# Altium PCB 4.2寸墨水屏-兼容甘草酸不酸_2024-11-22.pcbdoc
Units mil, origin at the board's own origin, x right, y up, seen from the top; angles counter-clockwise.
Board outline 5779.52 x 5098.42 mil, 2 copper layers (Top Layer, Bottom Layer); 86 components, 68 nets, 320 pads, 212 vias.
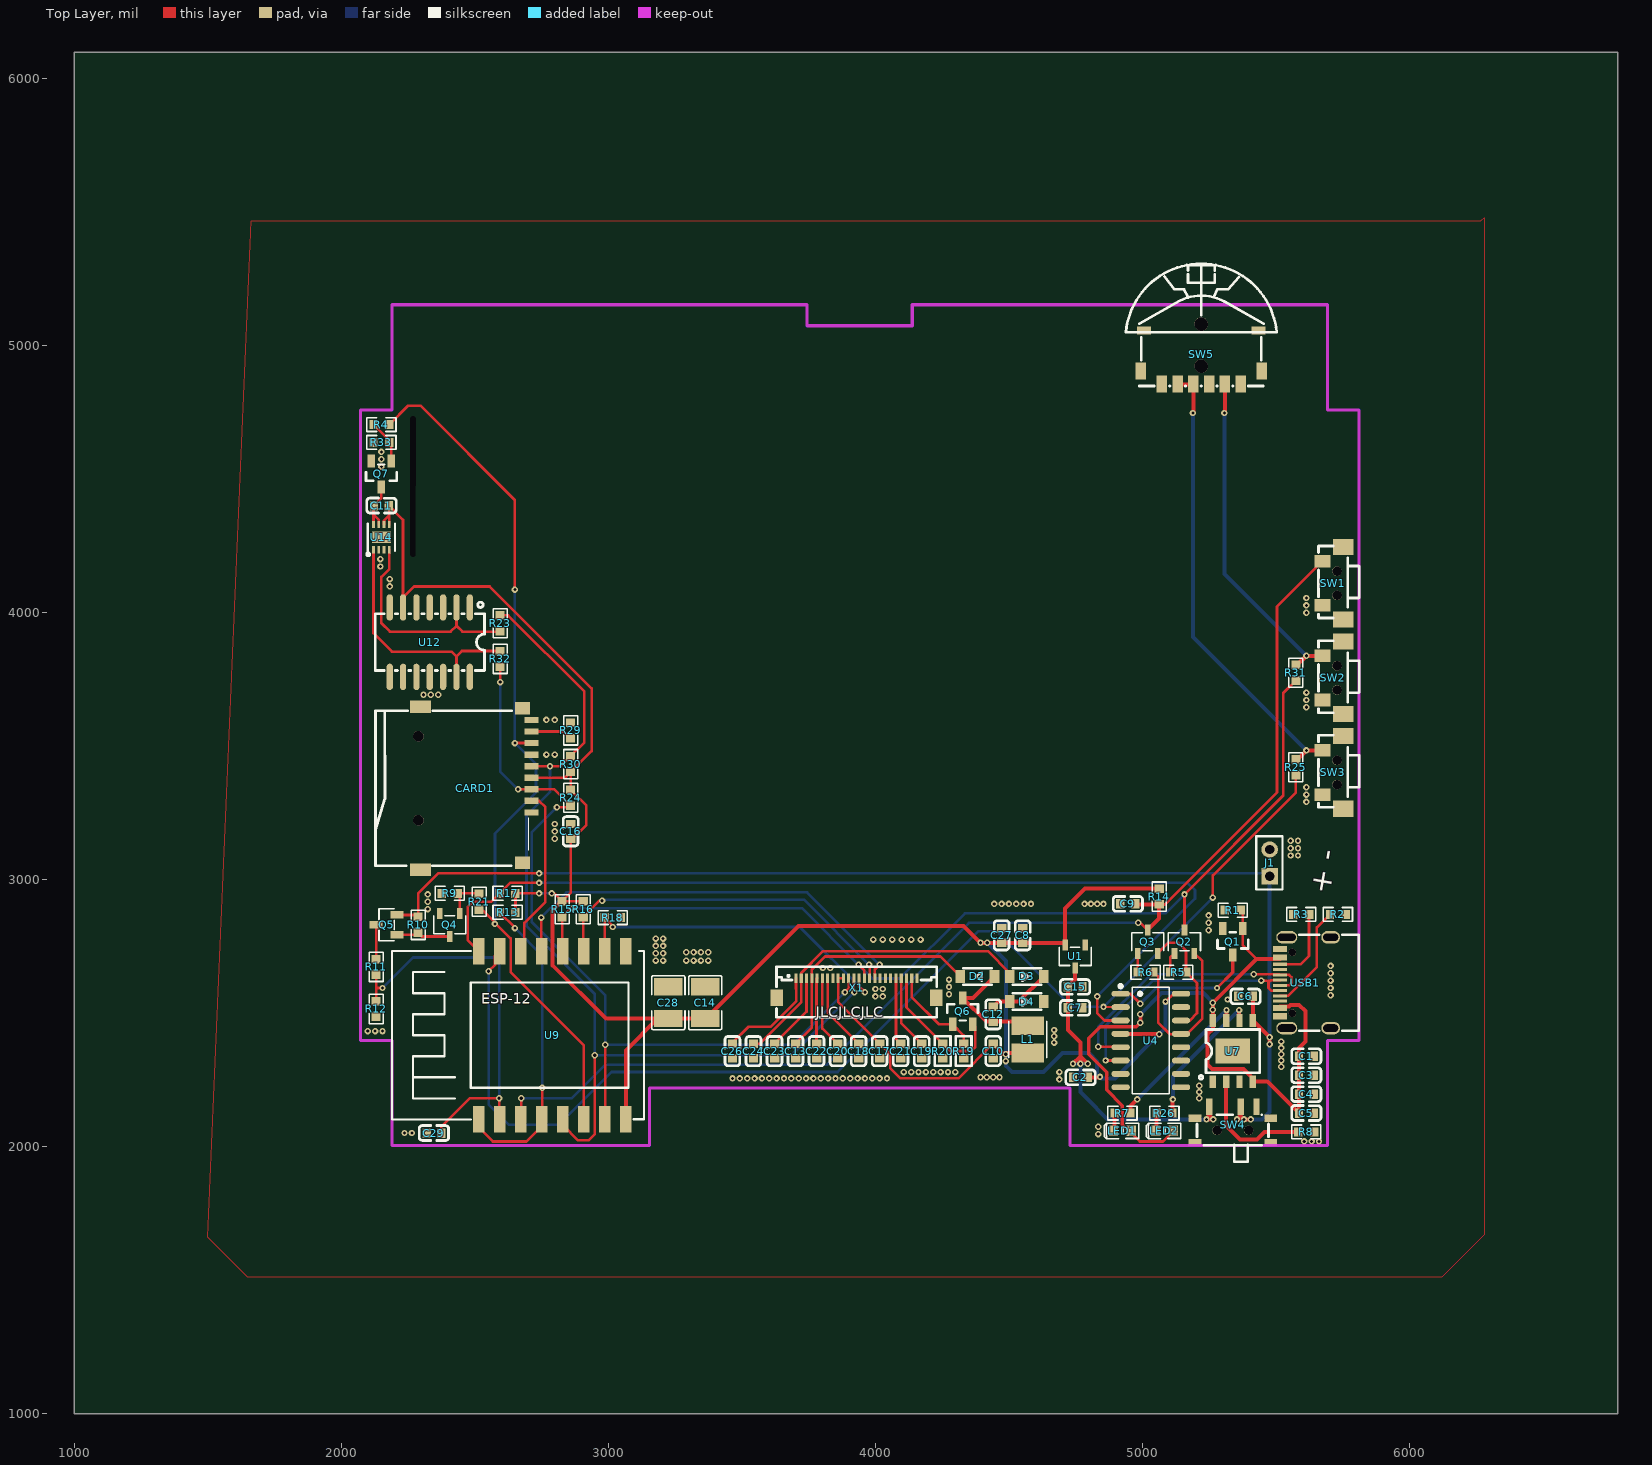
[diagram p0: Top Layer view]
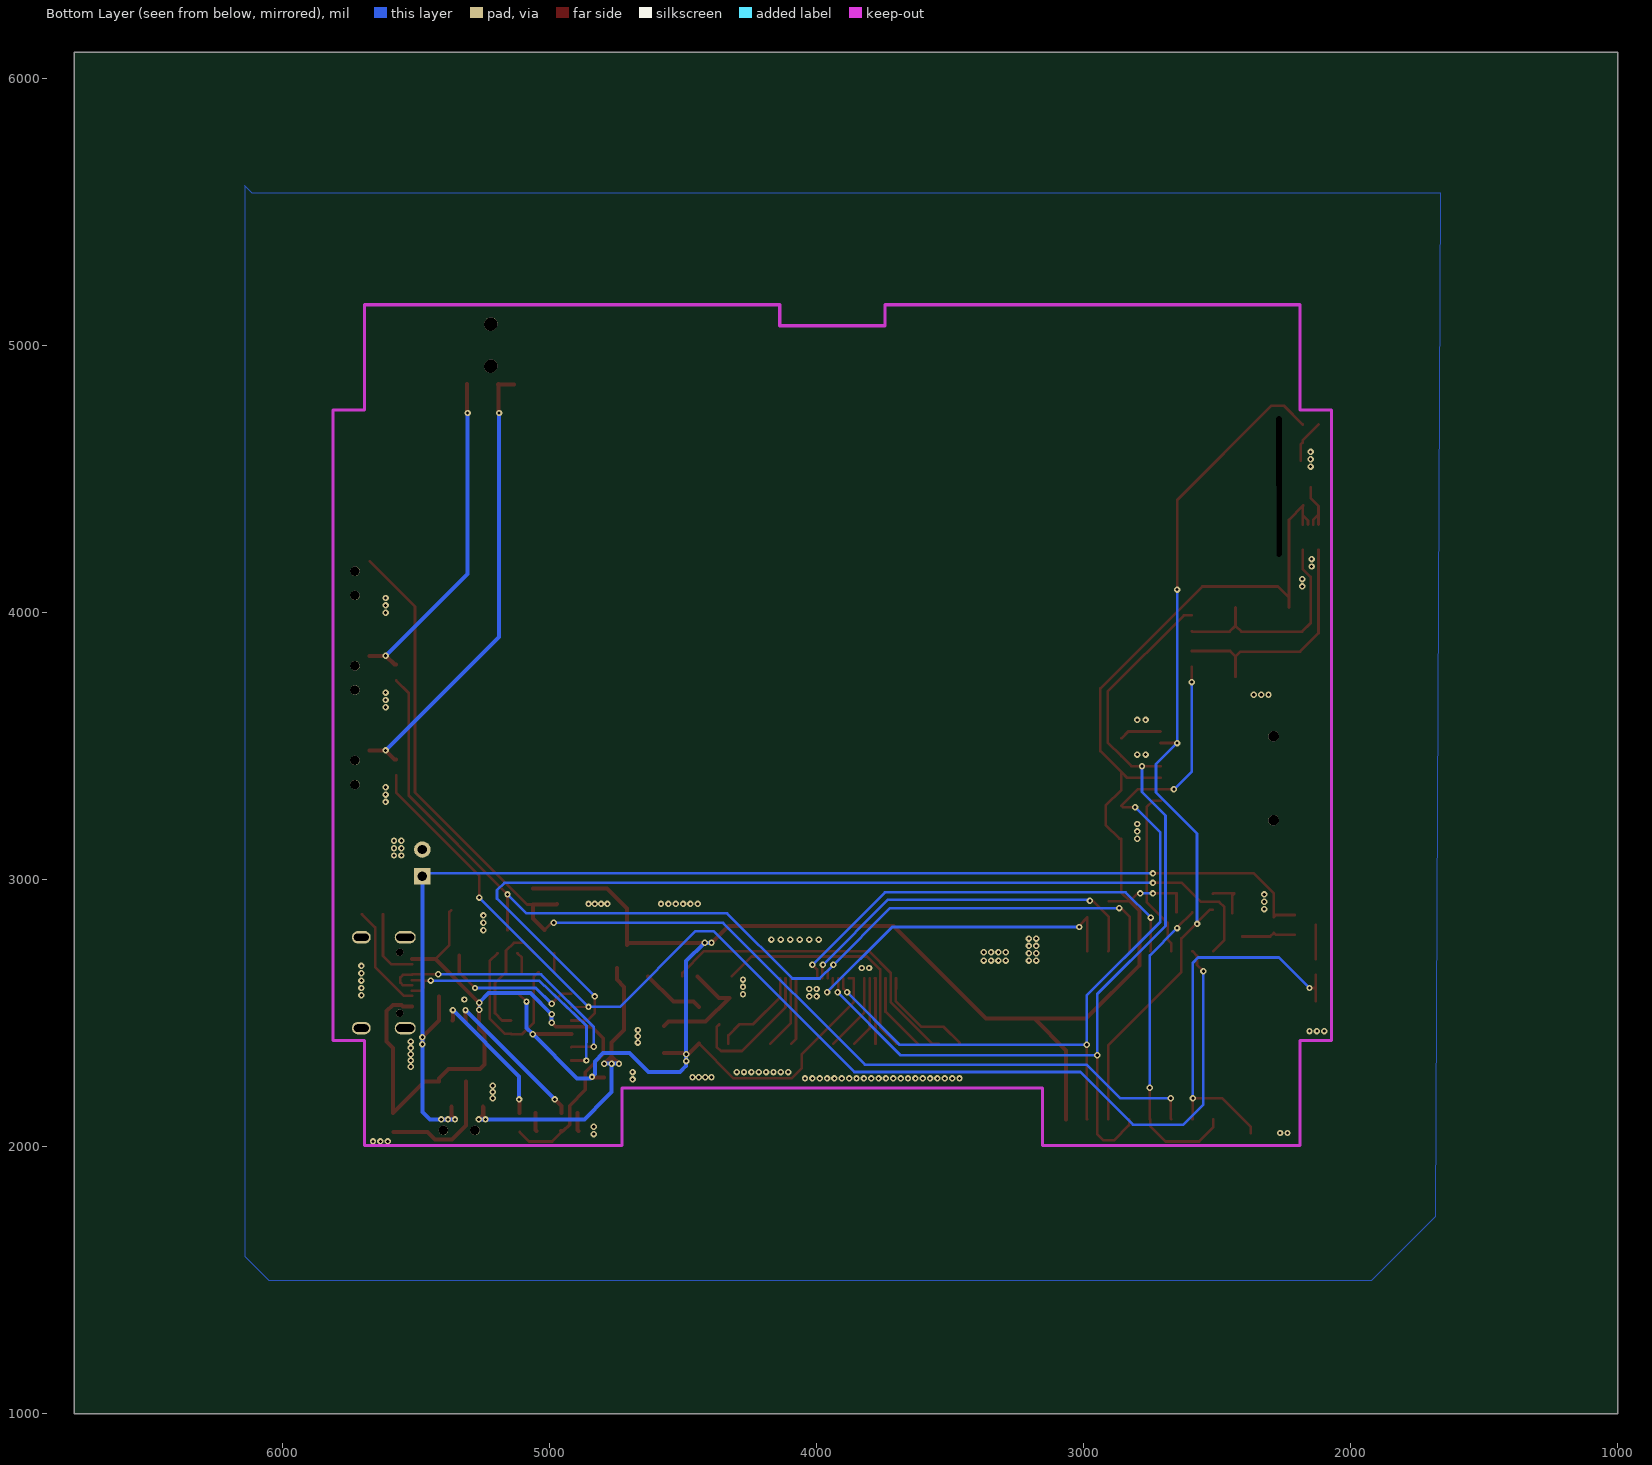
[diagram p1: Bottom Layer view, seen from below]

## Layer stack, top to bottom
Top Layer: signal copper (thickness not stored)
Dielectric: dielectric 12.6, FR-4, Dk 4.8
Bottom Layer: signal copper (thickness not stored)

## Board outline
6779.52,1000 1000,1000 1000,6098.42 6779.52,6098.42
cut-out: 2277.91,4726.27 2277.2,4216.83 cw(c2267.36,4218.6) 2257.52,4216.83 2257.91,4726.27 cw(c2267.91,4726.27) 2277.91,4726.27

## Components (designator, comment, footprint, x,y, rotation, side; value= is the part's Value field where it differs from the comment)
C1 "0.1uF" C0603#1 5614.16,2338.58 r0 top
C2 "0.1uF" C0603#1 4767.66,2259.84 r180 top
C3 "10uF" C0603#1 5614.16,2267.72 r0 top
C4 "0.1uF" C0603#1 5614.16,2196.85 r0 top
C5 "10uF" C0603#1 5614.16,2125.98 r0 top
C6 "10uF" C0603#1 5385.82,2562.99 r180 top
C7 "10uF" C0603#1 4748.02,2519.68 r0 top
C8 "10uF" C0603#1 4551.18,2791.34 r270 top
C9 "1uF" C0603#1 4944.88,2909.45 r180 top
C10 "4.7uF" C0603#2 4440.94,2358.27 r270 top
C11 "0.1uF" C0603#1 2149.57,4401.54 r180 top
C12 "0.1uF" C0603#1 4440.94,2496.06 r90 top
C13 "1uF" C0603#1 3700.78,2358.27 r90 top
C14 "100uF" C1210 3362.2,2539.37 r270 top
C15 "10uF" C0603#1 4748.02,2598.42 r0 top
C16 "0.1uF" C0603#1 2858.26,3181.1 r270 top
C17 "1uF" C0603#1 4015.74,2358.27 r90 top
C18 "1uF" C0603#1 3937,2358.27 r90 top
C19 "1uF" C0603#1 4173.22,2358.27 r90 top
C20 "1uF" C0603#1 3858.26,2358.27 r90 top
C21 "1uF" C0603#1 4094.48,2358.27 r90 top
C22 "1uF" C0603#1 3779.52,2358.27 r90 top
C23 "1uF" C0603#1 3622.04,2358.27 r90 top
C24 "1uF" C0603#1 3543.3,2358.27 r90 top
C26 "1uF" C0603#1 3464.56,2358.27 r90 top
C27 "10uF" C0603#1 4472.44,2791.34 r270 top
C28 "100uF" C1210 3224.41,2539.37 r270 top
C29 "0.1uF" C0603#1 2346.45,2051.18 r0 top
CARD1 "TF-01A" TF-SMD_TF-01A 2503.93,3342.52 r270 top
D2 "MBR0530" SOD-123 4381.88,2637.79 r0 top
D3 "MBR0530" SOD-123 4566.92,2637.79 r180 top
D4 "MBR0530" SOD-123 4566.92,2543.3 r180 top
J1 "BAT PADS" HDR-F-2.54_1X2 5476.37,3062.99 r90 top
L1 "68uH" IND-SMD_L3.5-W3.0 4570.86,2401.57 r270 top
LED1 "LED-0603_G" LED0603_GREEN 4925.19,2059.05 r180 top
LED2 "LED-0603_R" LED0603_RED 5082.67,2059.05 r180 top
Q1 "SI2302" SOT-23(SOT-23-3) 5338.57,2767.71 r180 top
Q2 "S8050" SOT-23-3_L3.0-W1.7-P0.95-LS2.9-BR 5157.47,2767.71 r270 top
Q3 "S8050" SOT-23-3_L3.0-W1.7-P0.95-LS2.9-BR 5019.68,2767.71 r270 top
Q4 "S8050" SOT-23-3_L3.0-W1.7-P0.95-LS2.9-BR 2405.51,2830.71 r90 top
Q5 "SI2305" SOT-23-3_L2.9-W1.3-P1.90-LS2.4-BR 2169.29,2830.71 r0 top
Q6 "SI2302" SOT-23(SOT-23-3) 4326.77,2507.87 r0 top
Q7 "SI2302" SOT-23(SOT-23-3) 2149.61,4519.68 r180 top
R1 "100K" R0603#1 5338.57,2885.82 r180 top
R2 "5.1K" R0603#1 5732.27,2870.08 r180 top
R3 "5.1K" R0603#1 5594.48,2870.08 r180 top
R4 "100R" R0603#1 2149.61,4704.72 r180 top
R5 "10K" R0603#1 5133.86,2653.54 r180 top
R6 "10K" R0603#1 5011.77,2653.54 r180 top
R7 "1K" R0603#1 4925.16,2125.94 r180 top
R8 "10K" R0603#1 5614.16,2055.14 r180 top
R9 "100K" R0603#1 2405.47,2948.84 r0 top
R10 "10K" R0603#1 2287.36,2830.74 r90 top
R11 "4.7K" R0603#1 2129.92,2673.23 r90 top
R12 "1K" R0603#1 2129.97,2515.74 r90 top
R13 "10K" R0603#1 2622.05,2877.95 r180 top
R14 "10K" R0603#1 5062.98,2937.01 r270 top
R15 "10K" R0603#1 2826.77,2889.76 r270 top
R16 "10K" R0603#1 2905.51,2889.76 r270 top
R17 "10K" R0603#1 2622.05,2948.82 r180 top
R18 "10K" R0603#1 3015.74,2858.26 r180 top
R19 "10K" R0603#2 4330.69,2358.24 r90 top
R20 "0.47R" R0603#2 4251.96,2358.27 r90 top
R21 "10K" R0603#1 2515.76,2917.34 r90 top
R23 "330R" R0603#1 2594.49,3960.62 r270 top
R24 "10K" R0603#1 2858.26,3307.08 r90 top
R25 "10R" R0603#1 5574.8,3421.26 r90 top
R26 "1K" R0603#1 5082.66,2125.94 r180 top
R29 "10K" R0603#1 2858.26,3559.04 r270 top
R30 "10K" R0603#1 2858.26,3433.07 r270 top
R31 "100R" R0603#1 5574.8,3775.59 r90 top
R32 "330R" R0603#1 2594.49,3826.77 r270 top
R33 "100K" R0603#1 2149.61,4637.79 r180 top
SW1 "TS-1101VS-B-A-A" SW-SMD_TS-1101VS-C-A-B 5712.59,4110.23 r270 top
SW2 "TS-1101VS-B-A-A" SW-SMD_TS-1101VS-C-A-B 5712.59,3755.9 r270 top
SW3 "TS-1101VS-B-A-A" SW-SMD_TS-1101VS-C-A-B 5712.59,3401.57 r270 top
SW4 "MSK12C02" SW-TH_MSK12C02 5338.57,2082.68 r0 top
SW5 "TM-2103" SW-SMD_TM-2103 5220.47,4956.69 r0 top
U1 "ME6210A33M3G" SOT-23-3_L3.0-W1.7-P0.95-LS2.9-BR 4748.02,2712.6 r90 top
U4 "CH340C" SOP-16_L10.0-W3.9-P1.27-LS6.0-BL 5031.49,2397.64 r270 top
U7 "TP4056" ESOP-8_L4.9-W3.9-P1.27-LS6.0-BL-EP 5338.57,2358.27 r0 top
U9 "ESP8266模组标注版" ESP-12 2789.37,2417.32 r90 top
U12 "BL8025T" SOP-14_L10.3-W5.3-P1.27-LS7.8-BL 2330.71,3889.76 r180 top
U14 "SHT30-DIS-B" DFN-8_L2.5-W2.5-P0.50-BL-EP 2149.61,4283.46 r0 top
USB1 "KH-TYPE-C-16P" USB-C-SMD_KH-TYPE-C-16P 5610.23,2614.17 r90 top
X1 "AFC34-S24FIA-00" FPC-SMD_AFC34-S24FIA-00 3929.13,2594.49 r0 top

## Footprints (in the part's own frame and the unit in brackets; to place one, negate y for a bottom-side part, rotate by r counter-clockwise, add the part's x,y. Pads: shape width x height; smd on the part's side, far side on the other; paste and mask are expansions set on the pad)
C0603#1 [mm]
  rect 0.8x0.9 smd paste+0 mask+0.051: 1(-0.7,0) 2(0.7,0)
  silkscreen extent -1.41,-0.71 1.39,0.72
C0603#2 [mm]
  rect 0.8x0.9 smd paste+0 mask+0.102: 1(-0.7,0) 2(0.7,0)
  silkscreen extent -1.4,-0.7 1.4,0.72
C1210 [mm]
  rect 1.635x2.7 smd paste-100 mask+0.051: 1(-1.517,0) 2(1.517,0)
  silkscreen extent -2.56,-1.58 2.56,1.58
DFN-8_L2.5-W2.5-P0.50-BL-EP [mm]
  rect 0.25x0.7 smd paste+0 mask+0.051: 1(-0.75,-1.2) 2(-0.25,-1.2) 3(0.25,-1.2) 4(0.75,-1.2) 5(0.75,1.2) 6(0.25,1.2) 7(-0.25,1.2) 8(-0.75,1.2)
  rect 1.8x1.1 smd paste+0 mask+0.051: 9(0,0)
  silkscreen extent -1.39,-1.77 1.3,1.3
ESOP-8_L4.9-W3.9-P1.27-LS6.0-BL-EP [mm]
  rect 0.6x1.2 smd paste+0 mask+0.051: 1(-1.905,-2.908) 2(-0.635,-2.908) 3(0.635,-2.908) 4(1.905,-2.908) 5(1.905,2.908) 6(0.635,2.908) 7(-0.635,2.908) 8(-1.905,2.908)
  rect 3.3x2.4 smd paste+0 mask+0.051: 9(0,0)
  silkscreen extent -3.2,-2.67 2.55,2.05
ESP-12 [mm]
  rect 2.5x1.1 smd paste+0 mask+0.102: 1(-8.002,7.002) 2(-8.002,4.991) 3(-8,2.998) 4(-8.001,0.989) 5(-8.002,-1.006) 6(-8.001,-3.002) 7(-8.002,-5.006) 8(-8.001,-7.002) 9(8,-6.996) 10(8,-4.998) 11(8.001,-2.998) 12(8,-0.998) 13(8.001,1.004) 14(8.002,3.004) 15(8,5.002) 16(8,7.002)
  silkscreen extent -8,-8.75 8,15.25
FPC-SMD_AFC34-S24FIA-00 [mm]
  rect 0.3x0.9 smd paste+0 mask+0.05: 1(-5.75,0.925) 2(-5.25,0.925) 3(-4.75,0.925) 4(-4.25,0.925) 5(-3.75,0.925) 6(-3.25,0.925) 7(-2.75,0.925) 8(-2.25,0.925) 9(-1.75,0.925) 10(-1.25,0.925) 11(-0.75,0.925) 12(-0.25,0.925) 13(0.25,0.925) 14(0.75,0.925) 15(1.25,0.925) 16(1.75,0.925) 17(2.25,0.925) 18(2.75,0.925) 19(3.25,0.925) 20(3.75,0.925) 21(4.25,0.925) 22(4.75,0.925) 23(5.25,0.925) 24(5.75,0.925)
  rect 1.2x1.6 smd paste+0 mask+0.05: 25(7.6,-0.925) 26(-7.6,-0.925)
  silkscreen extent -7.62,-2.79 7.62,2.02
HDR-F-2.54_1X2 [mil]
  rect 62x62 hole 35 paste+0 mask+2: 1(-50,0)
  round 62 hole 35 paste+0 mask+2: 2(50,0)
  silkscreen extent -100,-49 100,50
IND-SMD_L3.5-W3.0 [mm]
  rect 1.8x3.12 smd paste+0 mask+0.051: 1(1.303,0) 2(-1.303,0)
  silkscreen extent -1.75,-1.8 1.75,1.8
LED0603_GREEN [mm]
  rect 0.9x1 smd paste+0 mask+0.051: 1(-0.85,0) 2(0.85,0)
  silkscreen extent -1.54,-0.73 1.75,0.73
LED0603_RED [mm]
  rect 0.9x1 smd paste+0 mask+0.051: 1(-0.85,0) 2(0.85,0)
  silkscreen extent -1.54,-0.73 1.75,0.73
R0603#1 [mil]
  rect 31.75x34.02 smd paste-3937.01 mask+2: 1(-29.65,0) 2(29.65,0)
  silkscreen extent -55,-26 55,26
R0603#2 [mil]
  rect 31.5x35.43 smd paste+0 mask+4: 1(-27.56,0) 2(27.56,0)
  silkscreen extent -55,-30 55,30
SOD-123 [mil]
  rect 35.8x48 smd paste+0 mask+2: 1(64,0) 2(-64,0)
  silkscreen extent -53,-31 53,31
SOP-14_L10.3-W5.3-P1.27-LS7.8-BL [mm]
  oval 0.6x2.5 smd paste+0 mask+0.051: 1(-3.81,-3.3) 2(-2.54,-3.3) 3(-1.27,-3.3) 4(0,-3.3) 5(1.27,-3.3) 6(2.54,-3.3) 7(3.81,-3.3) 8(3.81,3.3) 9(2.54,3.3) 10(1.27,3.3) 11(0,3.3) 12(-1.27,3.3) 13(-2.54,3.3) 14(-3.81,3.3)
  silkscreen extent -5.2,-3.81 5.2,2.7
SOP-16_L10.0-W3.9-P1.27-LS6.0-BL [mm]
  oval 0.56x1.745 smd paste+0 mask+0.051: 1(-4.445,-2.873) 2(-3.175,-2.873) 3(-1.905,-2.873) 4(-0.635,-2.873) 5(0.635,-2.873) 6(1.905,-2.873) 7(3.175,-2.873) 8(4.445,-2.873) 9(4.445,2.873) 10(3.175,2.873) 11(1.905,2.873) 12(0.635,2.873) 13(-0.635,2.873) 14(-1.905,2.873) 15(-3.175,2.873) 16(-4.445,2.873)
  silkscreen extent -5.33,-3.02 5.08,1.77
SOT-23(SOT-23-3) [mm]
  rect 0.7x1.25 smd paste+0 mask+0.051: 1(-0.95,-1.25) 2(0.95,-1.25) 3(0,1.25)
  silkscreen extent -1.46,-0.9 1.46,0.65
SOT-23-3_L2.9-W1.3-P1.90-LS2.4-BR [mm]
  rect 1.25x0.7 smd paste+0 mask+0.051: 1(1,-0.95) 2(1,0.95) 3(-1,0)
  silkscreen extent -0.73,-1.53 0.73,1.53
SOT-23-3_L3.0-W1.7-P0.95-LS2.9-BR [mm]
  rect 1.037x0.532 smd paste+0 mask+0.051: 1(1.101,-0.95) 2(1.101,0.95) 3(-1.101,0)
  silkscreen extent -0.86,-1.53 0.86,1.53
SW-SMD_TM-2103 [mm]
  rect 1.3x0.8 smd paste+0 mask+0.051: a(-5.45,2.55) a(5.45,2.55)
  rect 1x1.6 smd paste+0 mask+0.051: b(3.75,-2.55) c(2.25,-2.55) d(0.75,-2.55) e(-0.75,-2.55) f(-2.25,-2.55) g(-3.75,-2.55) s(-5.75,-1.3) s(5.75,-1.3)
  round 1.3 hole 1.3 unplated paste+0: ""(0,-0.85) ""(0,3.15)
  silkscreen extent -7.18,-2.73 7.17,8.91
SW-SMD_TS-1101VS-C-A-B [mm]
  rect 1.2x1.524 smd paste+0 mask+0.051: 1(-2.101,-0.986) 2(2.101,-0.986)
  rect 1.524x1.95 smd paste+0 mask+0.051: 3(-3.449,0.985) 4(3.449,0.986)
  round 0.9 hole 0.9 unplated paste+0: ""(-1.15,0.424) ""(1.15,0.424)
  silkscreen extent -3.55,-1.35 3.31,2.52
SW-TH_MSK12C02 [mm]
  rect 0.6x1.524 smd paste+0 mask+0.051: 1(-2.25,1.7) 2(0.75,1.7) 3(2.25,1.7)
  rect 1.2x0.7 smd paste+0 mask+0.051: 4(-3.6,-1.7) 4(-3.6,0.6) 4(3.6,-1.7) 4(3.6,0.6)
  round 0.9 hole 0.9 unplated paste+0: ""(-1.5,-0.55) ""(1.5,-0.55)
  silkscreen extent -3.4,-3.53 3.4,0.95
TF-SMD_TF-01A [mm]
  rect 0.6x1.3 smd paste+0 mask+0.051: 1(2.301,5.276) 2(1.201,5.276) 3(0.101,5.276) 4(-0.999,5.276) 5(-2.099,5.276) 6(-3.199,5.276) 7(-4.299,5.276) 8(-5.399,5.276) 9(-6.499,5.276)
  rect 1.2x1.4 smd paste+0 mask+0.051: 10(-7.599,4.426) 13(7.081,4.426)
  rect 1.2x2 smd paste+0 mask+0.051: 11(-7.76,-5.276) 12(7.76,-5.276)
  round 1 hole 1 unplated paste+0: ""(-4.95,-5.478) ""(3.05,-5.475)
  silkscreen extent -7.37,-9.56 7.37,4.97
USB-C-SMD_KH-TYPE-C-16P [mm]
  oval 1.2x2 hole 0.7 slot 1.7 at 90 deg paste+0 mask+0.051: 1(-4.32,1.765) 2(4.32,1.765)
  oval 1.2x1.8 hole 0.7 slot 1.4 at 90 deg paste+0 mask+0.051: 3(-4.32,-2.415) 4(4.32,-2.415)
  rect 0.3x1.3 smd paste-100 mask+0.05: A1(-3.35,2.415) A4(-2.55,2.415) A5(-1.25,2.415) A6(-0.25,2.415) A7(0.25,2.415) A8(1.25,2.415) A9(2.55,2.415) A12(3.35,2.415) B1(3.05,2.415) B4(2.25,2.415) B5(1.75,2.415) B6(0.75,2.415) B7(-0.75,2.415) B8(-1.75,2.415) B9(-2.25,2.415) B12(-3.05,2.415)
  round 0.7 hole 0.7 unplated paste+0: ""(-2.89,1.235) ""(2.89,1.235)
  silkscreen extent -4.57,-5.08 4.57,0.57

## Via types
v1: diameter 24, hole 12, Top Layer to Bottom Layer, tented both sides, 212 vias

## Nets (pads, with @x,y where several pads share a name; then routed paths per layer and width w, separated by ;. In a path a pad name is that pad's centre, name@x,y a point inside that pad or via, vN(x,y) a via of type N, cw(c..) or ccw(c..) an arc to the next point about the centre after c; other vN are vias at no path point)
3V3: C2.1 C8.2 C10.1 C11.1 C14.2 C16.2 C17.2 C27.2 C28.2 CARD1.4 L1.1 R13.1 R14.1 R15.1 R16.1 R17.1 R24.2 R30.2 U1.2 U4.4 U4.16 U9.8 U12.6 U14.5 U14.6 X1.9 X1.10 | length 8939.7
  Top Layer w10: U14.6@2159.47,4330.74 2159.47,4345.64 2179.16,4365.34 ; U14.5 2179.14,4399.6 2177.16,4401.57 2230.7,4348.03 U12.6 ; U12.6@2230.66,4019.64 2230.66,4057.44 2271.66,4098.44 2555.07,4098.44 2936.97,3716.54 2936.97,3482.14 R30.2 ; R13.1@2651.7,2877.95 R17.1 v1(2740.16,2948.82) ; CARD1.4 2836.72,3381.86 R30.2 R24.2 2917.32,3277.68 2917.32,3204.72 2866.14,3153.54 C16.2 2858.26,2950.91 R15.1 ; v1(2787.39,2948.82) 2797.38,2948.82 R15.1 ; R16.1 R15.1 ; X1.10 X1.9 3860.22,2541.34 C17.2 4055.07,2346.44 4055.07,2295.24 4094.47,2255.94 4310.97,2255.94 C10.1@4440.97,2385.84 ; v1(5086.6,2543.31) 5115.94,2572.64 U4.16
  Top Layer w15: R15.1 2791.34,2883.98 2791.34,2679.24 2990.95,2479.63 C28.2 ; U9.8 3065.05,2360.33 3184.35,2479.63 C28.2 ; C10.1 4480.31,2346.45 v1(4488.19,2346.46) 4492,2350.27 L1.1 ; C27.2@4472.47,2763.74 v1(4419.14,2763.74) v1(4393.43,2763.74) 4330.42,2826.74 3712.57,2826.74 3365.46,2479.63 C14.2 C28.2 ; C27.2 C8.2 4702.81,2763.78 U1.2 4710.62,2891.73 4785.55,2966.66 R14.1 ; C2.1@4795.27,2259.84 4839.44,2259.84 v1(4840.98,2261.39) ; U4.4 4919.78,2421.26 v1(5062.98,2421.26)
  Bottom Layer w10: v1(2740.16,2948.82) v1(2787.39,2948.82)
  Bottom Layer w15: v1(4393.43,2763.74) v1(4419.14,2763.74) 4488.18,2694.69 v1(4488.19,2346.46) v1(4488.19,2320.59) 4488.18,2303.15 4511.81,2279.53 4629.91,2279.53 4700.82,2350.44 4799.16,2350.44 4830.66,2318.94 4830.66,2271.64 4846.47,2255.94 4897.66,2255.94 v1@5062.97,2421.24 ; v1(5062.98,2421.26) 5086.6,2444.88 v1(5086.6,2543.31)
ADC_IN: C29.2 R11.1 R12.2 U9.2 | length 1486.6
  Top Layer w10: R12.2@2129.93,2545.4 R11.1 ; 2129.93,2593.18 2131.23,2594.49 v1(2153.55,2594.49) ; C29.2@2374.07,2051.14 2374.07,2074.84 2480.26,2181.14 v1@2590.57,2181.14 ; v1(2590.55,2181.1) 2590.55,2104.62 U9.2
  Bottom Layer w10: v1(2153.55,2594.49) 2267.69,2708.64 2570.86,2708.64 2590.57,2688.94 v1@2590.57,2181.14
BAT: C6.1 J1.1 Q5.2 R10.2 SW4.2 U7.5 | length 4779.8
  Top Layer w10: Q5.2 2279.66,2868.11 R10.2 2287.4,2948.82 2362.2,3023.62 v1(2740.16,3023.62)
  Top Layer w15: v1(5380.4,2102.34) 5368.1,2114.64 SW4.2 5368.1,2116.08 v1(5354.36,2102.34) v1(5406.12,2102.34) ; C6.1 5413.58,2562.79 U7.5 ; U7.5@5413.56,2472.74 v1@5476.36,2410.14 ; v1@5476.37,2383.75 v1(5476.36,2410.18)
  Bottom Layer w10: v1(2740.16,3023.62) 5476.36,3023.64 J1.1
  Bottom Layer w15: v1(5354.36,2102.34) v1(5380.4,2102.34) v1(5406.12,2102.34) ; v1@5406.16,2102.34 5448.77,2102.34 5476.36,2129.94 v1(5476.36,2383.75) v1(5476.36,2410.18) J1.1
BAT+: C7.1 C15.1 SW4.1 U1.3 | length 1331.2
  Top Layer w15: v1(4740.15,2311.03) 4767.72,2338.59 ; U1.3 4748.02,2625.98 C15.1 C7.1 4720.47,2437.01 4767.72,2389.76 4767.72,2358.27 ; v1(4767.72,2311.03) 4767.72,2358.27 ; v1(4795.27,2311.03) 4767.72,2338.57 ; v1(5240.15,2102.36) v1(5265.48,2102.36) 5249.99,2117.84 SW4.1 5248.02,2147.64 v1@5248.02,2106.3 ; 4767.72,2338.59 4767.72,2358.27 ; 4767.72,2338.57 4767.72,2358.27
  Bottom Layer w15: v1(4740.15,2311.03) v1(4767.72,2311.03) ; v1(4795.27,2311.03) v1(4767.72,2311.03) ; v1(5265.48,2102.36) v1(5240.15,2102.36) 4870.07,2102.36 4788.09,2184.34 4767.72,2204.72 v1(4767.72,2311.03)
CARD1_8: CARD1.8 R29.2 | length 157.3
  Top Layer w10: CARD1.8 2832.58,3555.09 R29.2
CH_PD: C9.1 Q3.3 R14.2 SW1.1 U9.3 | length 4466.5
  Top Layer w10: U9.3 2673.23,2104.25 v1(2673.22,2181.1) ; v1(4984.24,2838.58) 4992.18,2838.58 Q3.3 ; R14.2@5062.97,2907.34 5084.47,2907.34 5503.97,3326.74 5503.97,4023.04 SW1.1
  Top Layer w15: C9.1 4974.52,2907.35 R14.2 5062.98,2854.38 Q3.3
  Bottom Layer w10: v1@2673.26,2181.14 2862.16,2181.14 2988.16,2307.04 3818.86,2307.04 4350.36,2838.54 v1@4984.27,2838.54
D4_1: C12.2 D3.2 D4.1 | length 237.3
  Top Layer w15: C12.2 4460.62,2543.3 D4.1 4536.43,2543.3 D3.2
GDR: Q6.1 R19.2 X1.23 | length 355.8
  Top Layer w10: X1.23 4135.81,2561.03 4238.17,2458.67 Q6.1 4330.7,2417.33 R19.2
GND: C1.2 C2.2 C3.2 C4.2 C5.2 C6.2 C7.2 C8.1 C9.2 C10.2 C13.1 C14.1 C15.2 C16.1 C17.1 C18.1 C19.1 C20.1 C21.1 C22.1 C23.1 C24.1 C26.1 C27.1 C28.1 C29.1 CARD1.6 CARD1.9 CARD1.10 CARD1.11 CARD1.12 CARD1.13 D4.2 J1.2 Q1.2 Q4.2 Q7.2 R1.2 R2.1 R3.2 R8.1 R9.1 R12.1 R18.1 R19.1 R20.1 R29.1 R33.2 SW1.2 SW1.3 SW1.4 SW2.2 SW2.3 SW2.4 SW3.2 SW3.3 SW3.4 SW4.4 SW5.a SW5.b U1.1 U7.1 U7.3 U9.9 U12.7 U12.11 U14.2 USB1.1 USB1.2 USB1.3 USB1.4 USB1.A1 USB1.A12 USB1.B1 USB1.B12 X1.8 X1.17 X1.25 X1.26
  other v1: 5606.3,2019.69 5633.85,2019.69 5661.4,2019.69 4834.64,2047.25 2236.22,2051.18 2263.78,2051.18 4834.64,2074.81 5212.6,2181.1 5212.6,2204.73 5212.6,2228.35 4688.98,2251.97 3464.57,2255.91 3492.12,2255.91 3519.68,2255.91 3547.24,2255.91 3574.8,2255.91 3602.36,2255.91 3629.91,2255.91 3657.47,2255.91 3685.03,2255.91 3712.59,2255.91 3740.16,2255.91 3767.72,2255.91 3795.28,2255.91 3822.84,2255.91 3850.39,2255.91 3877.95,2255.91 3905.51,2255.91 3933.07,2255.91 3960.62,2255.91 3988.18,2255.91 4015.74,2255.91 4043.3,2255.91 4393.69,2259.84 4417.31,2259.84 4440.94,2259.84 4464.56,2259.84 4106.3,2279.53 4133.85,2279.53 4161.41,2279.53 4188.98,2279.53 4216.53,2279.53 4244.09,2279.53 4271.65,2279.53 4299.2,2279.53 4688.98,2279.53 5519.68,2299.21 5519.68,2322.84 5519.68,2346.46 5519.68,2370.08 4669.28,2389.77 5519.68,2393.7 4669.28,2413.39 2098.43,2433.07 2125.99,2433.07 2153.55,2433.07 4669.28,2437.01 5318.9,2551.18 3999.99,2562.99 4027.55,2562.99 5704.72,2566.93 4275.59,2570.87 3999.99,2590.55 4027.55,2590.55 5704.72,2594.49 4275.59,2598.43 5704.72,2622.05 4275.59,2625.99 5704.72,2649.61 3803.14,2669.29 3830.7,2669.29 5704.72,2677.17 3177.16,2696.85 3204.72,2696.85 3291.34,2696.85 3318.89,2696.85 3346.45,2696.85 3374.01,2696.85 3177.16,2724.41 3204.72,2724.41 3291.34,2728.35 3318.89,2728.35 3346.45,2728.35 3374.01,2728.35 3177.16,2751.97 3204.72,2751.97 3992.12,2775.59 4027.55,2775.59 4062.99,2775.59 4098.43,2775.59 4133.85,2775.59 4169.28,2775.59 3177.16,2779.53 3177.16,2779.53 3204.72,2779.53 5248.02,2811.02 5248.02,2838.58 5248.02,2866.14 2322.84,2889.76 4444.88,2909.45 4472.44,2909.45 4499.99,2909.45 4527.56,2909.45 4555.11,2909.45 4582.68,2909.45 4783.45,2909.45 4807.09,2909.45 4830.7,2909.45 4854.32,2909.45 2322.84,2917.32 2322.84,2944.88 5555.11,3090.55 5582.66,3090.55 5555.11,3118.11 5582.66,3118.11 5555.11,3145.67 5582.66,3145.67 2799.22,3153.54 2799.22,3181.1 2799.22,3208.66 5614.16,3291.34 5614.16,3318.9 5614.16,3346.46 2767.72,3468.5 2799.22,3468.5 2767.72,3598.42 2799.22,3598.42 5614.16,3645.67 5614.16,3673.23 2307.09,3692.91 2334.64,3692.91 2362.2,3692.91 5614.16,3700.79 5614.16,4000 5614.16,4027.56 5614.16,4055.12 2181.11,4098.42 2181.11,4125.98 2145.66,4173.23 2145.66,4200.79 2149.61,4547.24 2149.61,4574.8 2149.61,4602.36
GPIO0: Q2.3 R15.2 R31.1 U9.12 X1.14 | length 3879.9
  Top Layer w10: U9.12 2826.77,2734.18 R15.2 2860.36,2893.7 v1(2866.14,2893.7) ; v1(3937.01,2681.1) 3958.65,2659.45 X1.14@3958.65,2630.9 ; v1@5157.47,2944.84 5527.56,3314.94 5527.56,3698.74 R31.1 ; Q2.3@5157.48,2811.04 5157.48,2885.83 v1(5157.48,2944.88)
  Bottom Layer w10: v1(2866.14,2893.7) 3724.41,2893.7 v1(3937.01,2681.1) ; v1(3937.01,2681.1) 3988.16,2629.94 4090.57,2629.94 4334.66,2874.04 5086.56,2874.04 v1@5157.47,2944.84
GPIO0_1: R31.2 SW2.1 SW5.c | length 1371.3
  Top Layer w10: R31.2 5608.13,3838.58 v1(5614.16,3838.58) SW2.1
  Top Layer w15: v1(5307.07,4748.03) 5309.05,4749.99 SW5.c ; R31.2 5580.83,3805.24 v1(5614.16,3838.58) ; v1(5614.16,3838.58) SW2.1
  Bottom Layer w15: v1(5307.07,4748.03) 5307.08,4145.66 v1(5614.16,3838.58)
GPIO2: R16.2 U9.11 X1.15 | length 1379.7
  Top Layer w10: U9.11 2905.51,2734.2 R16.2 2966.65,2921.26 v1(2976.38,2921.26) ; v1(3976.38,2681.1) 3978.33,2681.1 X1.15
  Bottom Layer w10: v1@2976.36,2921.24 2980.26,2925.24 3732.26,2925.24 v1(3976.38,2681.1)
GPIO4: U9.13 X1.16 | length 1603.6
  Top Layer w10: v1(2748.03,2858.27) 2748.03,2734.13 U9.13 ; X1.16 3998.02,2663.38 v1(4015.74,2681.1)
  Bottom Layer w10: v1(2748.03,2858.27) 2842.51,2952.75 3744.15,2952.75 v1@4015.77,2681.14
GPIO5: CARD1.2 U9.14 | length 639.5
  Top Layer w10: U9.14@2671.16,2732.34 2671.16,2761.64 2685.07,2775.64 2685.07,2838.54 2763.76,2917.34 2763.76,3271.64 2740.16,3295.24 CARD1.2
GPIO12: CARD1.7 R4.1 R21.1 U9.6 | length 3344.8
  Top Layer w10: R4.1 2250.13,4775.58 2263.78,4775.58 2295.27,4775.58 2649.61,4421.25 v1(2649.61,4086.61) ; R21.1@2515.76,2887.64 2525.76,2887.64 2633.86,2779.54 2633.86,2653.54 2907.57,2379.84 U9.6 ; v1(2649.61,3511.81) CARD1.7@2711.63,3511.81
  Bottom Layer w10: v1(2574.8,2834.65) 2574.8,3173.23 2728.34,3326.77 2728.34,3433.07 v1(2649.61,3511.81) v1(2649.61,4086.61)
GPIO13: CARD1.3 R24.1 R32.2 U9.7 X1.11 | length 3122.4
  Top Layer w10: v1(2594.49,3740.16) R32.2 ; v1(2661.41,3338.58) CARD1.3@2711.63,3338.58 ; CARD1.3 2797.14,3338.55 R24.1 2852.48,3271.64 v1(2807.07,3271.64) ; U9.7 2988.19,2103.99 v1(2988.18,2381.89) ; v1(3885.82,2578.74) 3899.59,2592.51 X1.11
  Bottom Layer w10: v1(2594.49,3740.16) 2594.49,3405.51 v1(2661.41,3338.58) ; v1(2807.07,3271.64) 2712.57,3177.14 2712.57,2842.54 2988.16,2566.94 v1(2988.18,2381.89) ; v1(2988.18,2381.89) 3688.97,2381.89 v1(3885.82,2578.74)
GPIO14: CARD1.5 R23.1 R30.1 U9.5 X1.12 | length 3678.5
  Top Layer w10: R23.1@2594.47,3990.24 2623.86,3990.24 2909.47,3704.74 2909.47,3513.94 R30.1 ; CARD1.5 v1(2781.14,3425.17) 2820.72,3425.17 R30.1 ; U9.5 2828.97,2080.44 2885.86,2023.64 2925.16,2023.64 2948.76,2047.24 v1(2948.76,2342.54) ; X1.12 3919.28,2578.74 v1(3921.26,2578.74)
  Bottom Layer w10: v1@2781.16,3425.14 2781.16,3328.44 2692.86,3240.14 2692.86,2826.74 2948.76,2570.94 v1(2948.76,2342.54) 3685.05,2342.54 v1(3921.26,2578.74)
GPIO15: R18.2 U9.10 X1.13 | length 1280.8
  Top Layer w10: R18.2@2986.07,2858.24 U9.10@2986.16,2732.24 ; R18.2 3015.74,2828.61 v1(3015.74,2822.84) ; X1.13 3938.96,2600.4 v1(3960.62,2578.74)
  Bottom Layer w10: v1(3015.74,2822.84) 3716.53,2822.83 v1(3960.62,2578.74)
GPIO16: R13.2 U9.1 U9.4 | length 1179.5
  Top Layer w10: U9.1 2513.69,2072.92 2566.93,2019.68 2692.91,2019.68 2750.42,2077.19 U9.4 2751.97,2103.87 v1(2751.97,2220.47) ; R13.2@2592.39,2877.95 2649.61,2820.73 v1(2649.61,2818.9)
  Bottom Layer w10: v1(2649.61,2818.9) 2751.97,2716.54 v1@2751.97,2220.44
PREVGH: C13.2 D2.2 X1.4 | length 910.3
  Top Layer w10: C13.2 3761.8,2446.85 X1.4 3761.8,2663.38 3811.02,2712.6 4243.08,2712.6 D2.2
PREVGL: C24.2 D3.1 X1.2 | length 1214.3
  Top Layer w10: C24.2 3566.97,2385.84 3722.47,2541.34 3722.47,2630.94 3722.47,2651.54 3803.16,2732.24 4421.27,2732.24 4502.97,2650.64 D3.1@4502.97,2637.84
Q2_1: Q2.1 R5.2 | length 77.4
  Top Layer w10: R5.2 5104.19,2708.47 Q2.1
Q3_1: Q3.1 R6.2 | length 70.8
  Top Layer w10: R6.2@4982.16,2653.54 Q3.1@4982.27,2724.34
Q6_3: C12.1 D2.1 L1.2 Q6.3 | length 439.8
  Top Layer w15: D2.1 4365.16,2557.07 Q6.3 4415.34,2468.5 C12.1 4555.22,2468.5 L1.2
Q7_1: Q7.1 R4.2 R33.1 | length 163.6
  Top Layer w10: R4.2 2179.26,4645.41 R33.1 2187.01,4630.05 Q7.1
R7_2: LED1.2 R7.2 | length 68.5
  Top Layer w15: LED1.2 4895.53,2062.86 R7.2@4895.53,2125.98
R10_1: Q4.3 Q5.1 R10.1 | length 205.7
  Top Layer w10: Q5.1 2279.66,2793.31 2287.41,2801.05 2301.1,2787.35 Q4.3@2405.51,2787.35
R11_2: Q5.3 R11.2 | length 127.8
  Top Layer w10: R11.2 Q5.3
R21_2: Q4.1 R9.2 R21.2 | length 159.3
  Top Layer w10: Q4.1 2442.91,2941.08 2435.17,2948.82 2513.9,2948.82 R21.2@2515.75,2946.97
R26_2: LED2.2 R26.2 | length 68.5
  Top Layer w15: LED2.2 5053.01,2062.86 R26.2@5053.01,2125.98
RESE: Q6.2 R20.2 X1.22 | length 530.1
  Top Layer w10: X1.22 4116.13,2521.66 R20.2 4279.52,2358.27 4330.7,2358.27 4358.26,2358.27 4374.01,2374.01 4374.01,2448.83 Q6.2
RX: R25.1 U4.2 U9.15 | length 4573.9
  Top Layer w10: v1(2551.16,2657.44) 2574.76,2681.14 2574.76,2714.64 U9.15@2592.47,2732.24 ; v1(4854.36,2523.64) U4.2 ; v1@5263.77,2933.04 5263.77,3015.74 5574.77,3326.74 R25.1
  Bottom Layer w10: v1(2551.16,2657.44) 2551.16,2157.44 2625.97,2082.64 2814.97,2082.64 3011.86,2279.54 3858.26,2279.54 4385.86,2807.04 4452.77,2807.04 4736.16,2523.64 v1(4854.36,2523.64) v1@5263.77,2933.05
  other v1: 5263.77,2933.07
RX_1: R25.2 SW3.1 SW5.e SW5.f | length 1720.8
  Top Layer w15: SW5.f@5133.85,4854.32 SW5.e@5192.9,4854.32 ; v1(5188.97,4748.03) 5190.94,4749.99 SW5.e ; R25.2 5580.84,3450.92 v1(5614.16,3484.25) ; v1@5614.19,3484.27 SW3.1
  Bottom Layer w15: v1(5188.97,4748.03) 5188.97,3909.44 v1(5614.16,3484.25)
S$68: 
S$157: 
S$9826: 
S$9830: 
S$9834: 
S$9841: 
S$9854: 
S$9858: 
S$9862: 
S$9866: 
S$9870: 
S$12177: 
S$15161: 
SCL1: R23.2 U12.2 U14.4 | length 833.3
  Top Layer w10: U14.4@2179.16,4236.24 2179.16,4163.34 2149.57,4133.84 2149.57,3960.64 2181.07,3929.14 2408.66,3929.14 2430.66,3951.14 ; U12.2 2430.7,3951.18 2452.76,3929.13 2592.64,3929.13 R23.2
SDA1: R32.1 U12.13 U14.1 | length 908.2
  Top Layer w10: U14.1 2120.07,3923.24 2188.97,3854.34 2412.57,3854.34 2430.66,3836.14 ; U12.13 2430.7,3836.18 2450.97,3856.44 R32.1
TX: R17.2 U4.3 U9.16 | length 3667.2
  Top Layer w10: U9.16 2472.44,2773.53 2472.44,2897.64 2492.12,2917.32 2560.9,2917.32 R17.2 2631.76,2988.19 v1(2740.16,2988.19) ; v1(4830.66,2563.04) 4830.66,2500.04 4858.27,2472.44 U4.3
  Bottom Layer w10: v1(2740.16,2988.19) 5169.27,2988.24 5196.86,2960.64 5196.86,2929.24 v1(4830.66,2563.04)
U4_1: Q1.3 U4.1 | length 553.4
  Top Layer w10: U4.1 4954.9,2572.64 v1(4992.11,2535.43)
  Top Layer w12: v1@5275.58,2594.49 v1(5279.52,2594.49) 5338.57,2653.54 Q1.3
  Bottom Layer w12: v1@4992.16,2535.44 5051.16,2594.44 v1@5279.56,2594.44
U4_13: Q2.2 R6.1 U4.13 | length 660.9
  Top Layer w10: R6.1@5041.47,2653.54 5059.05,2637.79 5059.06,2464.54 5102.36,2421.24 5143.16,2421.24 U4.13 ; U4.13 5166.73,2422.64 5224.4,2480.31 5224.4,2694.82 Q2.2
U4_14: Q3.2 R5.1 U4.14 | length 457.8
  Top Layer w10: Q3.2 5096.51,2763.78 5133.85,2763.78 5163.5,2734.12 R5.1 ; U4.14 5177.36,2472.64 5204.77,2500.04 5204.77,2612.34 R5.1
U7_2: R8.2 U7.2 | length 467.7
  Top Layer w15: U7.2@5313.56,2243.74 5313.56,2080.14 5366.14,2027.56 5429.13,2027.56 5456.68,2055.12 R8.2
U7_6: R26.1 U7.6 | length 528.9
  Top Layer w15: R26.1@5112.33,2125.98 5112.33,2175.33 v1(5114.16,2177.17) ; v1(5362.19,2511.81) 5362.2,2474.15 U7.6
  Bottom Layer w15: v1(5114.16,2177.17) 5114.17,2263.78 v1(5362.19,2511.81)
U7_7: R7.1 U7.7 | length 574.6
  Top Layer w15: R7.1@4954.85,2125.98 4954.85,2151.71 v1(4980.31,2177.17) ; U7.7 5314.95,2474.14 v1(5314.95,2511.81)
  Bottom Layer w15: v1(4980.31,2177.17) v1(5314.95,2511.81)
U14_7: C11.2 Q7.3 U14.7 U14.8 | length 196.6
  Top Layer w10: 2120.07,4367.14 2139.76,4347.54 U14.7 ; U14.8 2120.07,4399.59 2122.05,4401.57 2149.61,4429.12 Q7.3
USB1_A5: R2.2 USB1.A5 | length 400.4
  Top Layer w10: USB1.A5 5545.27,2564.96 5653.53,2673.23 5653.53,2821 R2.2
USB1_B5: R3.1 USB1.B5 | length 277.5
  Top Layer w10: USB1.B5 5592.51,2683.07 5624.14,2714.69 R3.1
USBD+: U4.5 USB1.A6 USB1.B6 | length 1037.6
  Top Layer w10: v1(4834.64,2374.02) 4917.03,2374.01 U4.5 ; v1(5417.31,2645.67) 5513.17,2645.67 USB1.B6 5549.21,2643.7 5559.05,2633.86 5559.05,2614.17 5549.2,2604.33 USB1.A6
  Bottom Layer w10: v1(4834.64,2374.02) 4834.64,2448.82 5031.49,2645.67 v1(5417.31,2645.67)
USBD-: U4.6 USB1.A7 USB1.B7 | length 988.7
  Top Layer w10: v1(4862.16,2322.84) U4.6 ; v1(5444.88,2622.05) 5480.31,2622.05 5482.27,2624.01 ; USB1.B7 5482.28,2584.64 5472.43,2594.49 5472.43,2614.17 5482.27,2624.01 ; USB1.A7 5482.27,2624.01
  Bottom Layer w10: v1(4862.16,2322.84) 4861.47,2452.94 5039.36,2622.05 5045.66,2622.04 v1(5444.88,2622.05)
VIN: C1.1 C3.1 C4.1 C5.1 LED1.1 LED2.1 Q1.1 R1.1 U7.4 U7.8 USB1.A4 USB1.A9 USB1.B4 USB1.B9 | length 2920.9
  Top Layer w10: LED1.1@4954.72,2055.12 4990.15,2019.68 5076.77,2019.68 LED2.1@5112.2,2055.11 ; R1.1 5375.98,2878.08 Q1.1 5375.98,2753.92 5427.15,2702.75
  Top Layer w13: LED1.1@4958.66,2059.04 4948.77,2059.04 4925.16,2082.64 4925.16,2153.54 4866.16,2212.64 4866.16,2279.54 4799.16,2346.44 4799.16,2405.54 4842.56,2448.84 4976.36,2448.84 v1@4992.16,2464.54
  Top Layer w15: v1(4992.11,2464.57) v1(4992.11,2496.06) ; USB1.B9@5515.16,2525.64 5549.16,2525.64 5555.06,2531.54 5586.56,2531.54 5610.27,2507.84 5610.27,2393.74 5586.56,2370.04 C5.1 ; USB1.B4@5515.15,2702.75 5427.15,2702.75 v1(5263.59,2539.18) v1(5263.59,2513.18) U7.8 5263.58,2440.75 5244.09,2421.26 5244.09,2307.09 5259.84,2291.34 5377.94,2291.34 5413.58,2255.7 U7.4 5468.82,2243.77 C5.1
  Bottom Layer w10: v1(5263.59,2513.18) v1(5263.59,2539.18)
  Bottom Layer w15: v1(4992.11,2464.57) v1(4992.11,2496.06) ; v1@4992.16,2496.04 5070.86,2574.84 5227.97,2574.84 v1@5263.56,2539.14
X1_1: C26.2 X1.1 | length 392.9
  Top Layer w10: C26.2 3464.57,2389.74 3523.66,2448.84 3607.26,2448.84 3703.07,2544.64 X1.1@3702.76,2630.94
X1_3: C23.2 X1.3 | length 294.8
  Top Layer w10: C23.2 3742.11,2505.89 X1.3
X1_5: C22.2 X1.5 | length 247
  Top Layer w10: C22.2@3779.57,2385.84 3779.57,2630.94 X1.5
X1_6: C20.2 X1.6 | length 268.7
  Top Layer w10: X1.6 3801.17,2442.92 C20.2
X1_7: C18.2 X1.7 | length 293.2
  Top Layer w10: X1.7 3820.85,2501.98 C18.2
X1_20: C21.2 X1.20 | length 252.4
  Top Layer w10: X1.20 4076.76,2403.55 C21.2
X1_21: C19.2 X1.21 | length 276.9
  Top Layer w10: X1.21 4096.44,2462.61 C19.2
pads on no net: CARD1. CARD1.1 SW1. SW2. SW3. SW4. SW4.3 SW5. SW5.d SW5.g SW5.s U4.7 U4.8 U4.9 U4.10 U4.11 U4.12 U4.15 U7.9 U12.1 U12.3 U12.4 U12.5 U12.8 U12.9 U12.10 U12.12 U12.14 U14.3 U14.9 USB1. USB1.A8 USB1.B8 X1.18 X1.19 X1.24

## Polygon pours and split planes (outlines as drawn)
GND on Bottom Layer (solid): 1661.42,5570.86 6114.16,5570.86 6141.72,5598.42 6141.72,1590.55 6051.17,1500 1921.26,1500 1692.91,1728.35 1681.1,1740.16
GND on Top Layer (solid): 1661.42,5468.5 6267.71,5468.5 6279.52,5480.31 6279.52,1669.29 6122.04,1511.81 1649.61,1511.81 1500,1661.42

## Silkscreen, mask and mechanical layers (free items; w line width, h text height)
Top Overlay:
  text "+ -" at 5700.8,2941.87 h80 r80
  text "JLCJLCJLC" at 3775.59,2483.94 h40

## Text inside footprints (layer, text, board x,y; h text height)
U9: Top Overlay "ESP-12" at 2523.49,2535.08 h40